# EAGLE board 2DD-17-mk-1.6 (EAGLE 7.5.0)
VERSION: v1.5
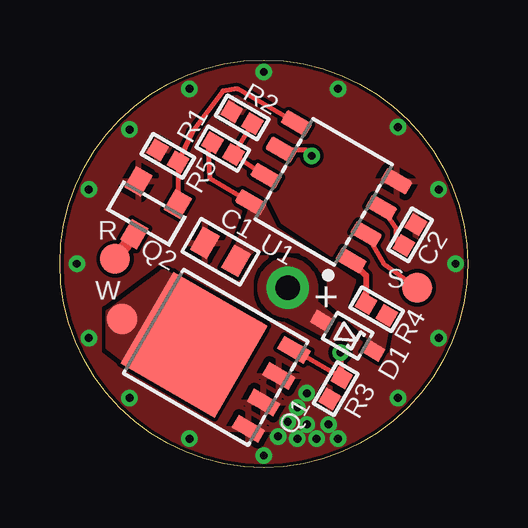
[diagram p0: board, top side]
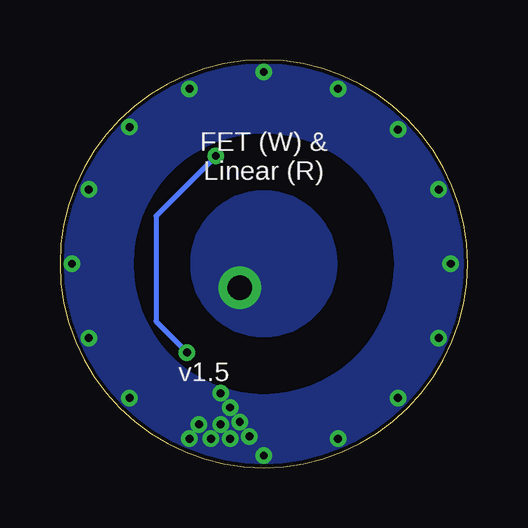
[diagram p1: board, bottom side, seen from below]

Size 17 x 17 mm. Coordinates in mm from the lower left corner, seen from the top.
Outline: 0,8.5 arc-180 17,8.5 arc-180 0,8.5
Copper layers (1*16): Top 0.0356mm / dielectric 1.5011mm / Bottom 0.0356mm
Design rules "LaenPCBOrder2 *": minimum track width 6mil, minimum drill 13mil, track to track 6mil, track to pad 6mil, pad to pad 6mil, via to via 6mil, smd to smd 6mil, copper to edge 6mil, drill to drill 6mil, minimum pad ring 7mil, minimum via ring 7mil, stop-mask expansion 3mil, vias tented up to drill 20mil, thermal gap 10mil

## Footprints (pad centres in the part's own frame; a part is rotated, then mirrored left to right if it is on the bottom)
1X01-1MM-CIR-NS = drill 1.016 pad 1.778: 1 0,0
1X01_NOSILK_NOSTOP = drill 0.33: P$1 0,0
C0603-TIGHTER = smd 0.8 x 1.1: 1 -0.75,0; 2 0.75,0
C0402 = smd 0.7 x 0.7: 1 -0.5,0; 2 0.5,0
SOD323-SCHOTTKY = smd 0.8 x 0.6: A -1.25,0; C 1.25,0
POWERPACK-SO-8 = smd 1.27 x 0.61: 1 -2.67,1.905; 2 -2.67,0.635; 3 -2.67,-0.635; 4 -2.67,-1.905 | smd 4.52 x 4.42: 5678 1.045,0
SOT23-CLOSER = smd 0.8 x 1: 1 -0.95,-1; 2 0.95,-1; 3 0,1
1X01-SMD-1.25MM-DIA-NS = smd 1.25 x 1.25: P$1 0,0
R0402 = smd 0.7 x 0.7: 1 -0.5,0; 2 0.5,0
SO08-NARROWER = smd 0.6 x 1.2: 1 -1.905,-2.416; 2 -0.635,-2.416; 3 0.635,-2.416; 4 1.905,-2.416; 5 1.905,2.416; 6 0.635,2.416; 7 -0.635,2.416; 8 -1.905,2.416
1X01_SMD_NOSTOP_NOSILK = smd 1.27 x 1.27: 1 0,0

## Placement (x,y rotation side)
+  M01PTH-1MM-CIR-NS  [1X01-1MM-CIR-NS]  9.5,7.5 180 top
-  M01NOT-A-VIA-NOPE  [1X01_NOSILK_NOSTOP]  0.7,8.5 90 bottom
C1  10u  [C0603-TIGHTER]  6.7,9 150 top
C2  1u  [C0402]  14.6,9.7 60 top
D1  BAT165  [SOD323-SCHOTTKY]  12,5.5 330 top
FRAME1  FRAME-LETTERNO_PACKAGE  [DUMMY]  0,0 0 top
Q1  SIR800DP  [POWERPACK-SO-8]  6.5,4.6 150 top
Q2  IRLML2502  [SOT23-CLOSER]  3.6,10.6 150 top
R  M01SMD-1.25MM-DIA  [1X01-SMD-1.25MM-DIA-NS]  2.3,8.7 0 top
R1  19K  [R0402]  6.8,13.3 150 top
R2  4K7  [R0402]  7.6,14.6 330 top
R3  47K  [R0402]  11.5,3.3 240 top
R4  10K  [R0402]  13.2,6.6 330 top
R5  47K  [R0402]  4.5,13 150 top
S  M01SMD-1.25MM-DIA  [1X01-SMD-1.25MM-DIA-NS]  14.9,7.5 0 top
U1  Tiny13  [SO08-NARROWER]  11,11.5 60 top
W  M01NOSTOP-CANTSTOP-DONTKNOWHOWTOSTOP  [1X01_SMD_NOSTOP_NOSILK]  2.6,6.2 270 top

## Library data of the parts
+ - C1 C2 D1 Q1 Q2 R R1-R5 S U1 W = a_parts
FRAME1 = a_parts; DESIGNER: sean@yak.net; VERSION: v1.5

## Nets
GND: -.P$1 C1.2 C2.2 Q1.1 Q1.2 Q1.3 Q2.2 R2.1 R3.2 R5.2 U1.4
OTC: C2.1 U1.3
PWM_R: Q2.1 R5.1 U1.5
PWM_W: Q1.4 R3.1 U1.6
R: Q2.3 R.P$1
RESET: R4.1 U1.1
SWITCH: S.P$1 U1.2
VBAT: +.1 D1.A
VCC: C1.1 D1.C R1.2 R4.2 U1.8
VDIV: R1.1 R2.2 U1.7
W: Q1.5678 W.1

## Tracks (layer width: path | path; a pad name or v marks a point on that pad's centre or on a via)
GND  (via drill 0.33)
  other vias: 8.5,0.5 16.5,8.5 8.5,16.5 14.1,2.9 11.6,1.2 9.1,1.3 9.5,1.9 10.3,3.1 15.8,5.4 15.8,11.6 14.1,14.2 11.6,15.8 5.4,15.8 2.9,14.1 1.2,11.6 1.2,5.4 2.9,2.9 5.4,1.2 10.3,1.8 9.9,1.2 9.9,2.5 11.2,1.8 10.7,1.2
  pour Bottom (isolate 0.152, rank 6, no thermals): 0,8.5 3,8.5 arc90 8.5,3 arc90 14,8.5 17,8.5 arc-90 8.5,0 arc-90
  pour Top (isolate 0.152, rank 6): 17,0 17,17 0,17 0,0
  pour Bottom (isolate 0.152, rank 6, no thermals): 17,8.5 14,8.5 arc90 8.5,14 arc90 3,8.5 0,8.5 arc-90 8.5,17 arc-90
OTC
  Top 0.2: U1.3 14,10 14,9.5 C2.1
PWM_R
  Top 0.2: U1.5 7.4,15.8 6.8,15.7 5.5,14 R5.1 4.93,11 Q2.1
PWM_W  (via drill 0.33)
  Top 0.2: U1.6 10.24,13.26 v10.5,13 | Q1.4 R3.1 v11.7,4.8
  Bottom 0.2: v10.5,13 13,10.5 13,6.1 v11.7,4.8
R
  Top 0.5: Q2.3 R.P$1
RESET
  Top 0.25: U1.1 12.77,8.02 R4.1
SWITCH
  Top 0.2: U1.2 13.5,8.5 S.P$1
VBAT
  pour Bottom (isolate 0.152, no thermals): 5.5,8.5 arc-180 11.5,8.5 arc-180
  pour Top (isolate 0.2, rank 2, no thermals): 9.5,8.7 arc-90 10.7,7.5 10.7,6.9 11.4,6.3 11,5.5 10.1,6 9.5,6.3 arc-90 8.3,7.5 arc-90
VCC
  Top 0.2: U1.8 6.27,12.05 6.2,13.3 R1.2
  pour Top (isolate 0.152, rank 3, no thermals): 13,5 13.1,5.2 11.2,6.9 11.2,7.9 10,9 8.1,9.1 7.4,8.3 7.2,8.8 8,11 8.5,11 9,10 12.3,7.8 11.9,6.7 13.2,5.9 13.5,6.5 13.8,6.5 13.5,5
VDIV
  Top 0.2: R2.2 R1.1 U1.7
W
  pour Top (isolate 0.152, rank 2, no thermals): 2,6.5 4.3,8.2 8.5,5.9 6.4,2.3 2.9,4.3 2,5

## Text on the board
bPlace: FET (W) & / Linear (R)